# Altium PCB PCB_Smartpill.pcbdoc
Units mm, origin at the board's own origin, x right, y up, seen from the top; angles counter-clockwise.
Board outline 200.21 x 103.89 mm, 2 copper layers (Top Layer, Bottom Layer); 62 components, 23 nets, 388 pads, 1 vias.
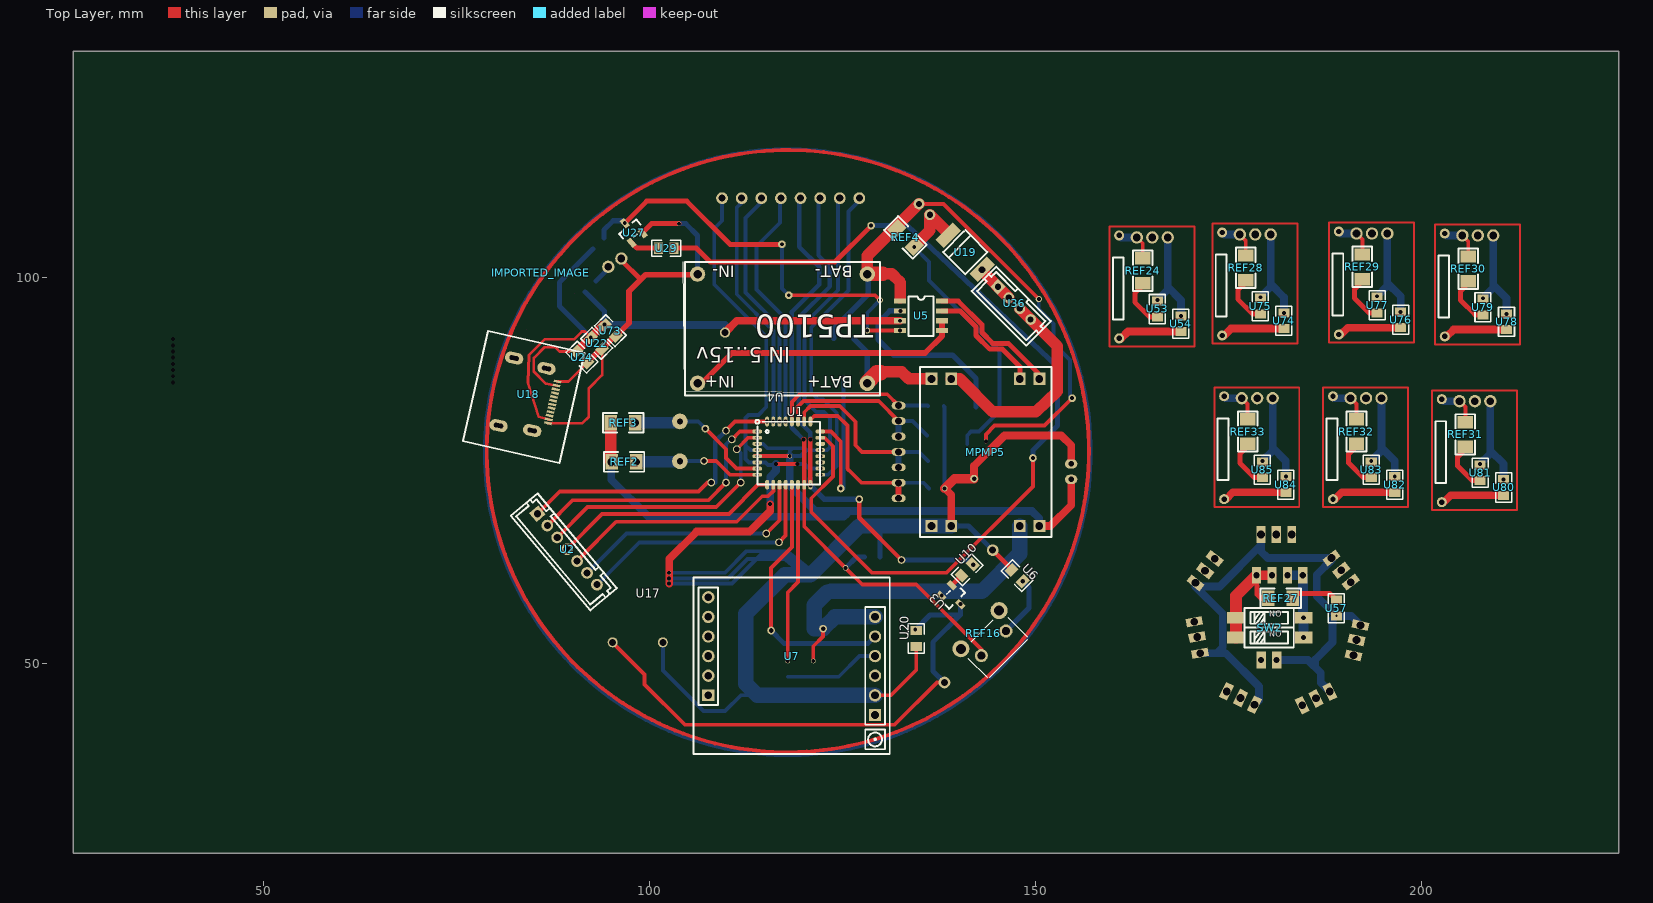
[diagram p0: Top Layer view]
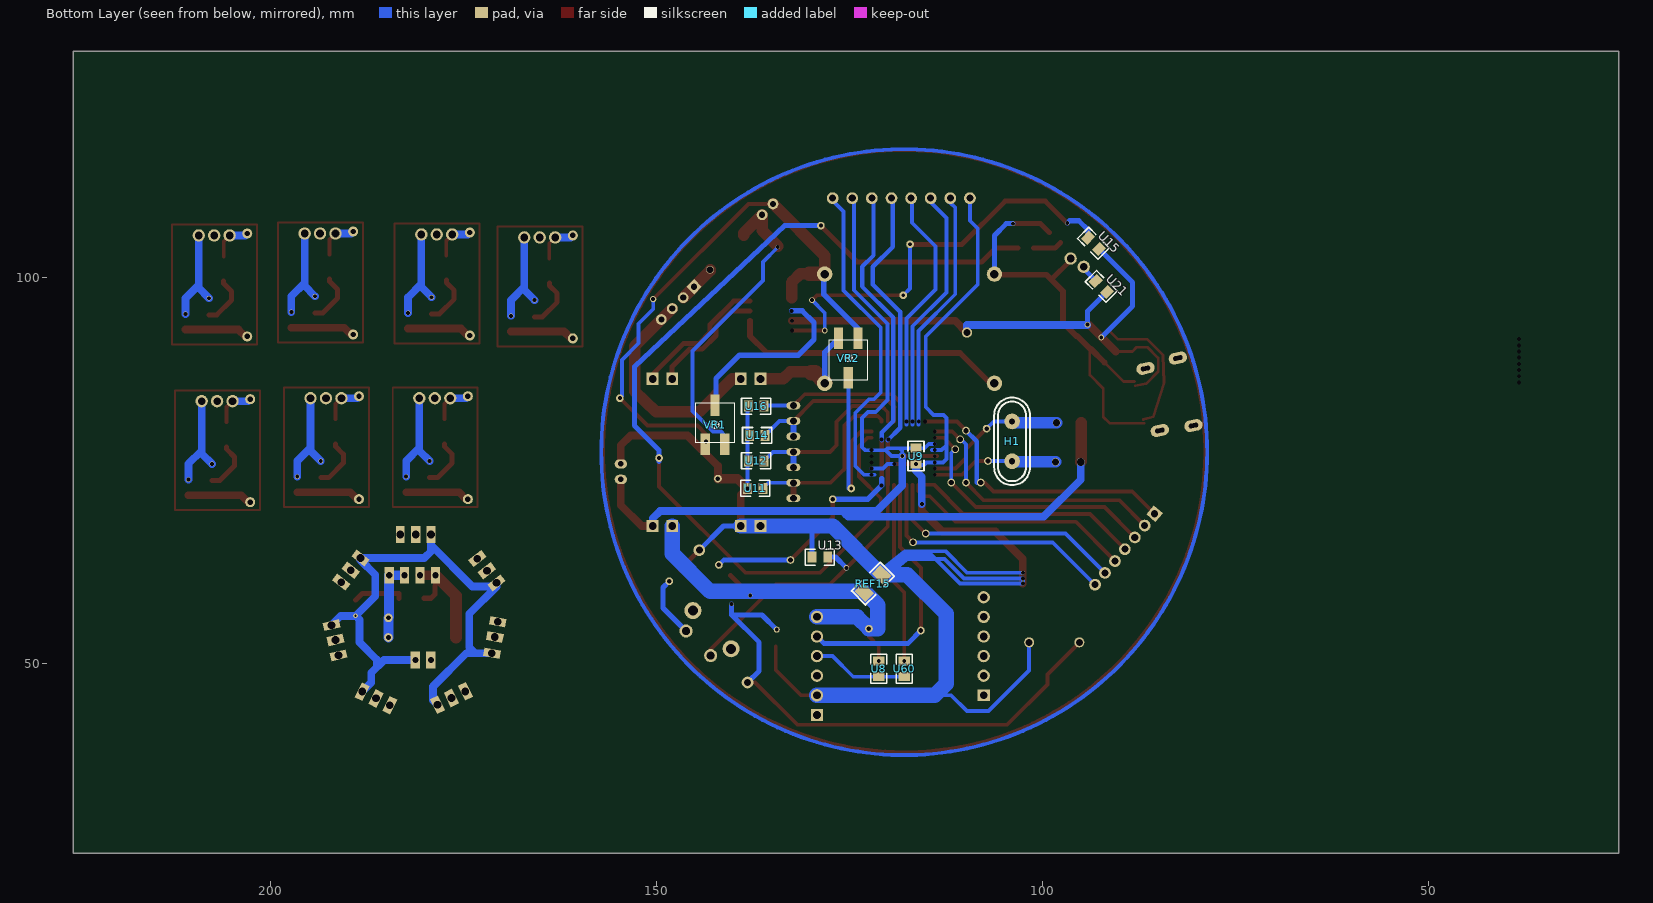
[diagram p1: Bottom Layer view, seen from below]

## Layer stack, top to bottom
Top Layer: signal copper (thickness not stored)
Dielectric: dielectric 0.32, FR-4, Dk 4.8
Bottom Layer: signal copper (thickness not stored)

## Board outline
225.612,25.4 25.4,25.4 25.4,129.286 225.612,129.286

## Components (designator, comment, footprint, x,y, rotation, side; value= is the part's Value field where it differs from the comment)
H1 "CRYSTAL" CRYSTAL 103.995,78.74 r90 bottom
IMPORTED_IMAGE "IMPORTED_IMAGE" IMPORTED_IMAGE 86.001,100.566 r0 top
MPMP5 "_" ? 143.619,77.343 r180 top
REF2 "1206" 1206#1 96.756,76.073 r0 top
REF3 "1206" 1206#1 96.629,81.153 r0 top
REF4 "1206" 1206#1 133.205,105.156 r135 top
REF15 "1206" 1206#2 122.029,60.325 r135 bottom
REF16 "SW_TACTILE_SKHH_ANGLED" SW_TACTILE_SKHH_ANGLED 143.746,53.467 r45 top
REF24 "1206" 1206#1 163.939,100.838 r90 top
REF27 "1206" 1206#1 181.789,58.42 r0 top
REF28 "1206" 1206#1 177.274,101.219 r90 top
REF29 "1206" 1206#1 192.387,101.346 r90 top
REF30 "1206" 1206#1 206.103,101.092 r90 top
REF31 "1206" 1206#1 205.722,79.629 r90 top
REF32 "1206" 1206#1 191.625,80.01 r90 top
REF33 "1206" 1206#1 177.528,80.01 r90 top
SW2 "SWITCH-KE-2BIT/2.54_SMD" SWITCH-KE-2BIT/2.54_SMD 180.392,54.61 r270 top
U1 "ATMEGA328" ATMEGA328 118.092,77.216 r0 top
U2 "CONN-TH_7P-P2.00_B7B-PH-K-M" CONN-TH_7P-P2.00_B7B-PH-K-M 89.39,64.77 r310 top
U3 "SOT-23-3_L2.9-W1.6-P1.90-LS2.8-BR-CW" SOT-23-3_L2.9-W1.6-P1.90-LS2.8-BR-CW 139.428,58.547 r135 top
U4 "TP5100-MODULE" TP5100-MODULE 129.903,84.709 r180 top
U5 "SO-8_L4.9-W3.9-P1.27-LS5.9-BL" SO-8_L4.9-W3.9-P1.27-LS5.9-BL 135.237,94.996 r270 top
U6 "0805" 0805#1 147.683,61.341 r315 top
U7 "SIM800L" SIM800L 126.728,56.007 r180 top
U8 "0805" 0805#2 121.267,49.276 r90 bottom
U9 "0805" 0805#2 116.441,76.835 r90 bottom
U10 "SENSORS-SMD_0805" SENSORS-SMD_0805#1 141.206,62.103 r45 top
U11 "0805" 0805#2 137.269,72.644 r0 bottom
U12 "0805" 0805#2 137.142,76.2 r0 bottom
U13 "0805" 0805#2 128.887,63.754 r0 bottom
U14 "0805" 0805#2 137.015,79.502 r0 bottom
U15 "SENSORS-SMD_0805" SENSORS-SMD_0805#2 93.454,104.394 r45 bottom
U16 "0805" 0805#2 137.142,83.312 r0 bottom
U17 "BUZZER-12MM-NS" BUZZER-12MM-NS 98.534,52.705 r0 top
U18 "TYPE C MINE" "TYPE C MINE" 83.548,83.82 r347 top
U19 "SS34" SS34 140.952,103.251 r315 top
U20 "0805" 0805#1 134.602,53.213 r90 top
U21 "0805" 0805#2 92.438,98.806 r45 bottom
U22 "0805" 0805#1 93.2,91.44 r135 top
U24 "0805" 0805#1 91.295,89.662 r135 top
U27 "SOT-23-3_L2.9-W1.3-P1.90-LS2.4-BR" SOT-23-3_L2.9-W1.3-P1.90-LS2.4-BR 97.645,106.045 r310 top
U29 "0805" 0805#1 102.217,103.759 r0 top
U36 "CONN-TH_B4B-PH-K-LF-SN" CONN-TH_B4B-PH-K-LF-SN 147.302,96.647 r135 top
U53 "0805" 0805#1 165.844,95.885 r90 top
U54 "0805" 0805#1 168.892,93.98 r90 top
U57 "0805" 0805#1 189.028,57.15 r90 top
U60 "0805" 0805#2 117.965,49.276 r90 bottom
U73 "0805" 0805#1 94.978,93.091 r135 top
U74 "0805" 0805#1 182.227,94.361 r90 top
U75 "0805" 0805#1 179.179,96.266 r90 top
U76 "0805" 0805#1 197.34,94.488 r90 top
U77 "0805" 0805#1 194.292,96.393 r90 top
U78 "0805" 0805#1 211.056,94.234 r90 top
U79 "0805" 0805#1 208.008,96.139 r90 top
U80 "0805" 0805#1 210.675,72.771 r90 top
U81 "0805" 0805#1 207.627,74.676 r90 top
U82 "0805" 0805#1 196.578,73.152 r90 top
U83 "0805" 0805#1 193.53,75.057 r90 top
U84 "0805" 0805#1 182.481,73.152 r90 top
U85 "0805" 0805#1 179.433,75.057 r90 top
VR1 "POTENCIOMETRO SMD" "POTENCIOMETRO SMD" 143.492,81.407 r180 bottom
VR2 "POTENCIOMETRO SMD" "POTENCIOMETRO SMD" 124.188,89.027 r0 bottom

## Footprints (in the part's own frame and the unit in brackets; to place one, negate y for a bottom-side part, rotate by r counter-clockwise, add the part's x,y. Pads: shape width x height; smd on the part's side, far side on the other; paste and mask are expansions set on the pad)
0805#1 [mm]
  rect 1.16x1.45 smd paste+0 mask+0.102: 1(-1.016,0) 2(1.016,0)
  silkscreen extent -1.9,-1.03 1.87,1.04
0805#2 [mm]
  rect 1.16x1.45 smd paste+0 mask+0.102: 1(1.016,0) 2(-1.016,0)
  silkscreen extent -1.87,-1.04 1.9,1.03
1206#1 [mm]
  rect 1.6x2 smd paste+0 mask+0.102: 1(-1.6,0) 2(1.6,0)
  silkscreen extent -2.61,-1.27 2.62,1.27
1206#2 [mm]
  rect 1.6x2 smd paste+0 mask+0.102: 1(1.6,0) 2(-1.6,0)
  silkscreen extent -2.62,-1.27 2.61,1.27
ATMEGA328 [mm]
  oval 1.27x0.5 smd paste+0 mask+0.05: 1(-4.088,2.8) 2(-4.088,2) 3(-4.088,1.2) 4(-4.088,0.4) 5(-4.088,-0.4) 6(-4.088,-1.2) 7(-4.088,-2) 8(-4.088,-2.8) 17(4.088,-2.8) 18(4.088,-2) 19(4.088,-1.2) 20(4.088,-0.4) 21(4.088,0.4) 22(4.088,1.2) 23(4.088,2) 24(4.088,2.8)
  oval 0.5x1.27 smd paste+0 mask+0.05: 9(-2.8,-4.088) 10(-2,-4.088) 11(-1.2,-4.088) 12(-0.4,-4.088) 13(0.4,-4.088) 14(1.2,-4.088) 15(2,-4.088) 16(2.8,-4.088) 25(2.8,4.088) 26(2,4.088) 27(1.2,4.088) 28(0.4,4.088) 29(-0.4,4.088) 30(-1.2,4.088) 31(-2,4.088) 32(-2.8,4.088)
  silkscreen extent -4.32,-4.06 4.06,4.32
BUZZER-12MM-NS [mil]
  round 51.2 hole 35.4 paste+0 mask+4: +(128,0) -(-128,0)
CONN-TH_7P-P2.00_B7B-PH-K-M [mil]
  rect 60x60 hole 36 paste+0 mask+4: 1(-236.22,0)
  round 60 hole 36 paste+0 mask+4: 2(-157.48,0) 3(-78.74,0) 4(0,0) 5(78.74,0) 6(157.48,0) 7(236.22,0)
  silkscreen extent -315,-110 315,67
CONN-TH_B4B-PH-K-LF-SN [mm]
  rect 1.4x1.4 hole 0.8 paste+0 mask+0.102: 1(3,0)
  round 1.4 hole 0.8 paste+0 mask+0.102: 2(1,0) 3(-1,0) 4(-3,0)
  silkscreen extent -5,-1.7 5,2.8
CRYSTAL [mil]
  round 80 hole 32 paste+0 mask+4: 1(101.6,0) 2(-101.6,0)
  silkscreen extent -224,-91 224,91
IMPORTED_IMAGE [mm]
"POTENCIOMETRO SMD" [mil]
  rect 46.85x109.84 smd paste+0 mask+4: 1(-10,-120) 2(40,80) 3(90,-120)
  silkscreen extent -60,-110 140,90
SENSORS-SMD_0805#1 [mm]
  rect 1.16x1.45 smd paste+0 mask+0.051: 1(-1.016,0) 2(1.016,0)
  silkscreen extent -1.9,-1.03 1.87,1.04
SENSORS-SMD_0805#2 [mm]
  rect 1.16x1.45 smd paste+0 mask+0.051: 1(1.016,0) 2(-1.016,0)
  silkscreen extent -1.87,-1.04 1.9,1.03
SIM800L [mm]
  rect 1.6x1.524 hole 1 paste+0 mask+0.102: 0(-2.54,12.7) 11(19.05,10.16)
  round 1.6 hole 1 paste+0 mask+0.102: 1(-2.54,10.16) 2(-2.54,7.62) 3(-2.54,5.08) 4(-2.54,2.54) 5(-2.54,0) 6(19.05,-2.54) 7(19.05,0) 8(19.05,2.54) 9(19.05,5.08) 10(19.05,7.62)
  silkscreen extent -4.45,-5.08 20.95,17.78
SO-8_L4.9-W3.9-P1.27-LS5.9-BL [mm]
  rect 0.65x1.55 smd paste+0 mask+0.102: 1(-1.905,-2.72) 2(-0.635,-2.72) 3(0.635,-2.72) 4(1.905,-2.72) 5(1.905,2.72) 6(0.635,2.72) 7(-0.635,2.72) 8(-1.905,2.72)
  silkscreen extent -2.54,-1.61 2.6,1.63
SOT-23-3_L2.9-W1.3-P1.90-LS2.4-BR [mm]
  rect 1.25x0.7 smd paste+0 mask+0.102: 1(1.25,-0.95) 2(1.25,0.95) 3(-1.25,0)
  silkscreen extent -0.65,-1.46 0.9,1.46
SOT-23-3_L2.9-W1.6-P1.90-LS2.8-BR-CW [mm]
  rect 1.25x0.7 smd paste+0 mask+0.051: 1(1.25,-0.95) 2(-1.25,0) 3(1.25,0.95)
  silkscreen extent -0.65,-1.46 0.9,1.46
SS34 [mil]
  rect 60x126 smd paste+0 mask+4: 1(122.5,0) 2(-122.5,0)
  silkscreen extent -80,-80 80,80
SW_TACTILE_SKHH_ANGLED [mm]
  round 1.7 hole 1 slot 1.005 at 0 deg paste+0 mask+0.102: 1(-2.25,-1.249) 2(2.251,-1.249)
  round 2.2 hole 1.3 paste+0 mask+0.102: ""(-3.5,1.25) ""(3.5,1.25)
  silkscreen extent -3.7,-4 3.7,0.95
SWITCH-KE-2BIT/2.54_SMD [mil]
  rect 60x90 smd paste+0 mask+4: 1(50,172.24) 2(-50,172.24) 3(-50,-172.24) 4(50,-172.24)
  silkscreen extent -100,-128 100,122
TP5100-MODULE [mm]
  round 2 hole 1.1 paste+0 mask+0.102: BAT+(1.625,-1.55) BAT-(1.625,-15.7) IN+(23.625,-1.55) IN-(23.625,-15.7)
  silkscreen extent 0,-17.25 25.25,0
"TYPE C MINE" [mm]
  oval 2.4x1.5 hole 0.6 slot 1.2 at 0 deg paste+0 mask+0.102: 25(-2.286,5.334) 25(-2.286,-3.646) 25(2.104,4.974) 25(2.104,-3.286)
  rect 1.01x0.35 smd paste+0 mask+0.102: A1(3.879,3.634) A2(3.879,3.094) A3(3.879,2.594) A4(3.879,2.094) A5(3.879,1.594) A6(3.879,1.094) A7(3.879,0.594) A8(3.879,0.094) A9(3.879,-0.406) A10(3.879,-0.906) A11(3.879,-1.406) A12(3.879,-1.906)
  silkscreen extent -6.35,-6.6 6.48,8
? [mil]
  rect 60x62.99 hole 39.37 paste+0 mask+4: 162(-273,376.5) 163(-173,376.5) 164(277,376.5) 165(177,376.5) 166(277,-373.5) 167(177,-373.5) 168(-273,-373.5) 169(-173,-373.5)
  silkscreen extent -335,-434 335,434

## Free pads (board coordinates)
  round 1.6 hole 1 paste+0 mask+0.102: 1(96.411,102.421) 1(163.177,105.156) 1(176.512,105.537) 1(176.766,84.328) 1(190.863,84.328) 1(191.625,105.664) 1(204.96,83.947) 1(205.341,105.41) 2(94.724,101.346) 2(165.177,105.156) 2(178.512,105.537) 2(178.766,84.328) 2(192.863,84.328) 2(193.625,105.664) 2(206.96,83.947) 2(207.341,105.41) 3(167.177,105.156) 3(180.512,105.537) 3(180.766,84.328) 3(194.863,84.328) 3(195.625,105.664) 3(208.96,83.947) 3(209.341,105.41)
  oval 1.8x1 hole 0.9 paste+0 mask+0.102: 1(132.316,71.374) 2(132.316,73.374) 3(132.316,75.374) 4(132.316,77.374) 5(132.316,79.374) 6(132.316,81.374) 7(132.316,83.374)
  rect 1.119x2.159 hole 1 rot 101 paste+0 mask+0.102: 1(170.613,55.372) 3(171.376,51.295)
  rect 1.119x2.159 hole 1 rot 51.5 paste+0 mask+0.102: 1(170.771,60.42) 3(173.261,63.551)
  rect 1.119x2.159 hole 1 rot 154.5 paste+0 mask+0.102: 1(178.414,44.633) 3(174.804,46.355)
  rect 1.119x2.159 hole 1 paste+0 mask+0.102: 1(183.249,66.675) 3(179.249,66.675)
  rect 1.119x2.159 hole 1 rot 26 paste+0 mask+0.102: 1(184.583,44.577) 3(188.178,46.33)
  rect 1.119x2.159 hole 1 rot 128.5 paste+0 mask+0.102: 1(188.393,63.627) 3(190.883,60.497)
  rect 1.119x2.159 hole 1 rot 77 paste+0 mask+0.102: 1(191.239,51.03) 3(192.139,54.927)
  round 1.4 hole 0.8 paste+0 mask+0.102: 2(134.96,109.497) 3(136.374,108.083)
  rect 1.199x2.159 hole 1 rot 101 paste+0 mask+0.102: 2(170.994,53.409)
  rect 1.199x2.159 hole 1 rot 51.5 paste+0 mask+0.102: 2(172.016,61.985)
  rect 1.199x2.159 hole 1 rot 154.5 paste+0 mask+0.102: 2(176.609,45.494)
  rect 1.199x2.159 hole 1 paste+0 mask+0.102: 2(181.249,66.675)
  rect 1.199x2.159 hole 1 rot 26 paste+0 mask+0.102: 2(186.38,45.454)
  rect 1.199x2.159 hole 1 rot 128.5 paste+0 mask+0.102: 2(189.638,62.062)
  rect 1.199x2.159 hole 1 rot 77 paste+0 mask+0.102: 2(191.639,53.023)
  round 1.524 hole 0.914 paste+0 mask+0.102: 3(109.456,110.236) 4(111.996,110.236) 5(114.536,110.236) 6(117.076,110.236) 7(119.616,110.236) 8(122.156,110.236) 9(124.696,110.236) 10(127.236,110.236)
  round 0.254 hole 0.508 paste+0.102 mask+0.102: 6(38.354,86.378) 7(38.354,87.178) 8(38.354,87.978) 9(38.354,88.778) 10(38.354,89.578) 11(38.354,90.378) 12(38.354,91.178) 13(38.354,91.978)
  oval 1.6x1.2 hole 0.7 paste+0 mask+0.102: 7(154.668,75.819) 8(154.668,73.819)
  round 0.051 hole 0.5 unplated paste+0 mask+0.102: 39(114.004,75.216) 40(114.004,74.416) 41(114.004,76.016) 42(114.004,76.816) 43(114.004,77.616) 44(114.004,78.416) 45(114.004,79.216) 46(114.004,80.016) 55(122.18,74.416) 56(122.18,75.216) 57(122.18,76.016) 58(122.18,76.816) 59(122.18,77.616) 67(117.692,81.304) 68(116.892,81.304) 69(116.092,81.304) 70(115.292,81.304) 75(119.997,78.994) 77(120.892,78.994)
  round 0.6 hole 0.5 paste+0 mask+0.102: 78(118.219,76.835) 143(117.965,50.292) 219(121.267,50.292) 220(165.844,97.028) 220(168.892,94.996) 220(179.179,97.409) 220(179.433,76.2) 220(182.227,95.377) 220(182.481,74.168) 220(193.53,76.2) 220(194.292,97.536) 220(196.578,74.168) 220(197.34,95.504) 220(207.627,75.819) 220(208.008,97.282) 220(210.675,73.787) 220(211.056,95.25)
  round 1 hole 1 paste+0 mask+0.102: 87(95.105,76.073)
  round 0.5 hole 0.5 paste+0 mask+0.102: 120(115.679,70.612) 124(102.598,60.325) 125(102.598,60.96) 126(102.598,61.722)
  round 1 hole 0.6 paste+0 mask+0.102: 127(142.095,73.914) 216(115.806,54.24) 218(122.536,54.483) 230(127.236,71.247) 232(132.697,63.373) 233(141.968,62.738) 233(148.401,60.623) 244(107.297,80.391) 245(107.118,76.2)
  round 0.051 hole 0.5 paste+0 mask+0.102: 128(132.57,95.631) 167(132.517,93.091) 169(132.517,94.361) 229(120.886,73.025) 237(116.441,75.819) 238(119.235,75.819)
  round 1 hole 0.5 paste+0 mask+0.102: 131(124.823,72.644) 170(149.715,76.581) 184(117.203,104.267) 185(118.092,97.663) 187(128.76,106.68)
  round 1 hole 0.7 paste+0 mask+0.102: 136(115.171,66.802) 138(116.822,65.659) 205(109.964,80.137) 206(110.726,78.994) 207(111.361,77.724) 208(111.869,73.406) 209(109.964,73.406) 210(108.059,73.406)
  round 1.35 hole 0.9 paste+0 mask+0.102: 164(109.837,92.837)
  round 0.51 hole 0.5 paste+0 mask+0.102: 181(103.868,106.934) 186(96.842,107.002)
  round 1 hole 0.9 paste+0 mask+0.102: 203(143.111,100.965)
  round 1.3 hole 0.7 paste+0 mask+0.102: 211(160.891,92.075) 211(174.226,92.456) 211(174.48,71.247) 211(188.577,71.247) 211(189.339,92.583) 211(202.674,70.866) 211(203.055,92.329) 212(160.891,105.41) 212(174.226,105.791) 212(174.48,84.582) 212(188.577,84.582) 212(189.339,105.918) 212(202.674,84.201) 212(203.055,105.664)
  round 0.75 hole 0.5 paste+0 mask+0.102: 221(129.903,97.028) 222(128.252,93.091) 224(138.285,72.644) 226(94.216,93.853) 228(92.438,92.202)
  round 1.119 hole 0.6 paste+0 mask+0.102: 239(184.767,55.88) 241(184.767,53.34)
  round 1.5 hole 0.9 paste+0 mask+0.102: 242(144.508,64.643)
  round 0.7 hole 0.5 paste+0 mask+0.102: 243(125.458,62.357)
  round 1 hole 0.914 paste+0.102 mask+0.102: 246(98.356,76.073) 247(98.229,81.153)
  round 0.52 hole 0.51 paste+0.102 mask+0.102: 248(137.904,58.801) 249(140.312,57.663) 251(134.348,103.886) 252(143.619,78.74)
  round 0.8 hole 0.51 paste+0.102 mask+0.102: 253(150.477,97.155) 255(134.475,54.356)
  round 1 hole 0.51 paste+0.102 mask+0.102: 254(154.795,84.328)
  round 1.524 hole 0.914 paste+0.102 mask+0.102: 256(138.256,47.51)
  rect 1.199x2.159 hole 0.798 paste+0 mask+0.102: P1(184.672,61.404) P2(182.691,61.404) P3(180.684,61.404) P3(181.281,50.419) P4(178.677,61.404) P4(179.274,50.419)

## Via types
v1: diameter 0.61, hole 0.305, Top Layer to Bottom Layer, tented both sides, 1 vias

## Nets (pads, with @x,y where several pads share a name; then routed paths per layer and width w, separated by ;. In a path a pad name is that pad's centre, name@x,y a point inside that pad or via, vN(x,y) a via of type N, cw(c..) or ccw(c..) an arc to the next point about the centre after c; other vN are vias at no path point)
0.75:  | length 35.1
  Top Layer w0.75: 106.281,86.106 106.294,86.36 106.916,86.36 110.726,90.17 135.745,90.17 137.957,92.382 137.957,93.091
1:  | length 31.3
  Bottom Layer w0.5: 114.449,109.601 112.504,107.656 112.504,98.044 116.893,93.655 116.893,80.917
2:  | length 30.9
  Bottom Layer w0.5: 111.948,109.601 111.361,109.014 111.361,97.79 116.093,93.058 116.093,80.917
S$4592: H1.1 H1.2 pad.40 pad.244 pad.245 pad.246 pad.247 REF2.2 REF3.2 U1.7 U1.8 | length 35.5
  Top Layer w0.5: pad.245 108.694,76.2 110.478,74.416 U1.8@114.004,74.416 ; pad.244 109.964,77.724 109.964,76.581 111.328,75.217 U1.7
  Bottom Layer w0.5: H1.2 104.036,76.2 pad.245 ; H1.1 106.367,81.321 pad.244
  Bottom Layer w1.5: pad.247 103.827,81.153 H1.1 ; pad.246 103.909,76.073 H1.2
S$5231:  | length 245
  Top Layer w0.5: 156.965,77.47 ccw(c117.965,77.47) 156.965,77.47
S$7168: pad.69
S$7171: pad.68
S$7175: pad.67
S$7303:  | length 41.2
  Bottom Layer w0.5: 121.785,74.422 123.172,74.422 124.315,75.565 124.315,82.423 122.537,84.201 121.902,84.201 121.013,85.09 121.013,93.472 125.839,98.298 125.839,108.491 126.949,109.601
S$7461:  | length 68.3
  Bottom Layer w0.5: 116.949,109.601 116.949,107.061 113.901,104.013 113.901,98.425 117.691,94.633 117.691,80.917 ; 122.156,77.597 123.045,77.597 123.426,77.978 123.426,81.788 122.664,82.55 121.648,82.55 120.124,84.074 120.124,93.98 124.45,98.306 124.45,109.601
S$8346: pad.216 U1.13 U7.4 | length 34.5
  Top Layer w0.5: pad.216 115.806,62.357 118.492,65.043 U1.13
  Bottom Layer w0.65: pad.216 117.457,52.578 128.379,52.578 U7.4
S$8348: pad.143 U1.14 | length 23.4
  Top Layer w0.5: pad.143 117.965,59.182 119.291,60.508 U1.14@119.291,73.129
S$8986: pad.128 | length 24.1
  Bottom Layer w0.7: 132.517,95.631 131.173,95.631 129.649,94.107 129.649,91.948 131.681,89.916 139.301,89.916 142.349,86.868 142.349,83.185
S$9004: VR1.2
S$11449: REF16.2 | length 8
  Bottom Layer w0.65: REF16.2@146.22,54.173 149.207,57.16 149.207,59.817 148.402,60.622
S$13526: U27.1 U29.1 | length 3.8
  Top Layer w0.65: U27.1 98.439,103.759 U29.1
S$19612: REF24.1 REF28.1 REF29.1 REF30.1 REF31.1 REF32.1 REF33.1 U53.1 U75.1 U77.1 U79.1 U81.1 U83.1 U85.1 | length 46.2
  Top Layer w0.65: REF24.1 163.939,98.933 162.923,97.917 162.923,96.774 164.828,94.869 U53.1 ; REF28.1 177.274,99.314 176.258,98.298 176.258,97.155 178.163,95.25 U75.1 ; REF33.1 177.528,78.105 176.512,77.089 176.512,75.946 178.417,74.041 U85.1 ; REF32.1 191.625,78.105 190.609,77.089 190.609,75.946 192.514,74.041 U83.1 ; REF29.1 192.387,99.441 191.371,98.425 191.371,97.282 193.276,95.377 U77.1 ; REF31.1 205.722,77.724 204.706,76.708 204.706,75.565 206.611,73.66 U81.1 ; REF30.1 206.103,99.187 205.087,98.171 205.087,97.028 206.992,95.123 U79.1
S$21981: pad.1@170.771,60.42 pad.1@178.414,44.633 pad.1@188.393,63.627 pad.2@191.639,53.023 pad.3@171.376,51.295 pad.3@179.249,66.675 pad.3@188.178,46.33 pad.3@192.139,54.927 pad.P3@181.281,50.419 pad.P4@179.274,50.419 U57.1 | length 76.9
  Bottom Layer w1: pad.3@171.376,51.295 173.521,51.295 ; pad.1@178.414,44.633 178.995,45.214 178.995,46.99 174.689,51.295 173.521,51.295 ; pad.P3@181.281,50.419 185.345,50.419 186.996,48.768 186.996,47.513 pad.3@188.178,46.33 ; 186.292,49.472 186.292,50.477 188.52,52.705 188.52,55.626 v1(189.028,56.134) ; pad.3@192.139,54.927 190.933,56.134 v1(189.028,56.134) ; 173.521,51.295 174.296,52.07 174.296,56.388 170.771,59.913 170.771,60.42 171.247,59.944 173.915,59.944 179.249,65.278 179.249,66.675 179.249,64.516 180.138,63.627 188.393,63.627 188.393,63.373 186.488,61.468 186.488,58.674 v1(189.028,56.134)
S$21983: REF27.2 U57.2 | length 6.6
  Top Layer w0.65: REF27.2 183.389,59.055 188.139,59.055 U57.2
S$24530: pad.239 pad.241 pad.P1 pad.P2 pad.P3@180.684,61.404 pad.P4@178.677,61.404 REF27.1 SW2.1 SW2.2 SW2.3 SW2.4 | length 25.4
  Top Layer w0.65: pad.P4@178.677,61.404 178.741,58.928 179.249,58.42 REF27.1@180.189,58.42
  Top Layer w1.2: pad.P4@178.677,61.404 pad.P3@180.684,61.404
  Top Layer w1.5: SW2.4 176.017,58.744 pad.P4@178.677,61.404
  Bottom Layer w1.2: pad.P2 pad.P1
  Bottom Layer w1.3: pad.P1 184.672,55.975 pad.239 pad.241
S$36070: MPMP5.162 MPMP5.163 MPMP5.164 MPMP5.165 MPMP5.166 MPMP5.167 MPMP5.168 MPMP5.169 pad.1@96.411,102.421 pad.1@132.316,71.374 pad.1@163.177,105.156 pad.1@176.512,105.537 pad.1@176.766,84.328 pad.1@190.863,84.328 pad.1@191.625,105.664 pad.1@204.96,83.947 pad.1@205.341,105.41 pad.2@94.724,101.346 pad.2@132.316,73.374 pad.2@134.96,109.497 pad.3@132.316,75.374 pad.3@136.374,108.083 pad.3@167.177,105.156 pad.3@180.512,105.537 pad.3@180.766,84.328 pad.3@194.863,84.328 pad.3@195.625,105.664 pad.3@208.96,83.947 pad.3@209.341,105.41 pad.4@132.316,77.374 pad.5@132.316,79.374 pad.6@132.316,81.374 pad.7@132.316,83.374 pad.7@154.668,75.819 pad.8@154.668,73.819 pad.41 pad.42 pad.43 pad.44 pad.56 pad.59 pad.75 pad.77 pad.78 pad.87 pad.120 pad.124 pad.125 pad.126 pad.127 pad.131 pad.136 pad.138 pad.164 pad.167 pad.169 pad.170 pad.181 pad.184 pad.185 pad.186 pad.187 pad.203 pad.205 pad.206 pad.207 pad.208 pad.209 pad.210 pad.211 pad.212 pad.218 pad.219 pad.220 pad.221 pad.222 pad.224 pad.226 pad.228 pad.229 pad.230 pad.232 pad.233 pad.237 pad.238 pad.242 pad.243 pad.248 pad.249 pad.252 pad.253 pad.254 pad.255 pad.256 REF2.1 REF3.1 REF4.1 REF15.1 REF15.2 REF16.1 REF24.2 REF28.2 REF29.2 REF30.2 REF31.2 REF32.2 REF33.2 U1.1 U1.2 U1.3 U1.5 U1.9 U1.10 U1.11 U1.12 U1.15 U1.16 U1.21 U1.23 U1.24 U1.25 U1.26 U1.27 U1.28 U1.32 U2.6 U2.7 U5.1 U5.3 U5.4 U5.5 U5.6 U5.7 U5.8 U6.1 U7.1 U7.3 U7.5 U8.1 U8.2 U9.1 U9.2 U11.1 U11.2 U12.1 U12.2 U13.1 U13.2 U14.2 U15.1 U15.2 U16.1 U16.2 U17.+ U17.- U18.A1 U18.A4 U18.A9 U18.A12 U19.1 U19.2 U20.1 U21.1 U21.2 U22.1 U22.2 U24.1 U24.2 U27.2 U27.3 U29.2 U36.2 U36.3 U36.4 U53.2 U54.1 U54.2 U60.2 U73.1 U73.2 U74.1 U74.2 U75.2 U76.1 U76.2 U77.2 U78.1 U78.2 U79.2 U80.1 U80.2 U81.2 U82.1 U82.2 U83.2 U84.1 U84.2 U85.2 VR1.1 VR2.1 VR2.2 VR2.3 | length 1999.8
  Top Layer w0.35: U18.A12 91.359,81.09 92.184,81.915 92.184,85.598 93.919,87.333 U22.1 ; 87.011,81.577 85.707,81.915 84.31,86.36 84.437,89.916 86.469,91.948 90.279,91.948 91.295,92.964 91.676,92.964 U22.2 ; 88.024,85.962 86.596,86.233 85.072,87.757 85.072,89.535 86.469,90.932 87.866,90.932 88.417,90.381 U24.2 ; U18.A1 89.558,86.487 U24.1
  Top Layer w0.5: 85.534,69.367 88.43,72.263 106.408,72.263 107.551,73.406 pad.210 ; 86.819,67.833 90.099,71.12 107.678,71.12 pad.209 ; 88.105,66.302 92.034,70.231 108.694,70.231 pad.208 ; 89.39,64.77 93.906,69.342 110.345,69.342 114.13,73.129 U1.9@115.293,73.129 ; 90.675,63.238 90.975,63.561 95.74,68.326 111.361,68.326 114.663,71.628 115.425,71.628 116.093,72.296 U1.10@116.093,73.129 ; U17.- 99.423,48.565 99.423,47.244 104.63,42.037 131.808,42.037 137.281,47.51 pad.256 ; pad.205 111.131,81.304 U1.32@115.292,81.304 ; pad.206 111.748,80.016 U1.1@114.004,80.016 ; pad.207 112.853,79.216 U1.2@114.004,79.216 ; U1.5@113.686,76.817 113.704,76.835 pad.78 ; pad.136 116.892,68.523 U1.11 ; pad.237 pad.238 ; pad.138 117.691,66.528 U1.12@117.691,73.129 ; pad.185 129.268,97.663 pad.221 ; U1.28@118.493,81.303 118.493,83.838 119.489,84.836 130.853,84.836 pad.7@132.316,83.373 ; U1.27 119.291,83.129 119.235,83.185 119.997,83.947 129.743,83.947 pad.6@132.316,81.374 ; U1.15@120.091,73.129 120.091,67.724 pad.243 127.617,60.198 134.602,60.198 143.04,51.76 REF16.1@143.04,50.993 ; U1.26 120.091,82.517 120.886,83.312 124.696,83.312 126.728,81.28 126.728,78.232 127.586,77.374 pad.4@132.316,77.374 ; U1.25 120.891,81.539 121.394,82.042 124.442,82.042 125.712,80.772 125.712,75.184 126.22,74.676 127.522,73.374 pad.2@132.316,73.374 ; pad.219 121.267,52.197 122.536,53.466 pad.218 ; U1.23 122.696,79.216 123.807,78.105 123.807,74.168 ; U1.24 123.547,80.016 124.823,78.74 pad.131 ; 123.743,74.105 123.807,74.168 ; pad.222 U5.4 ; U7.1 131.3,45.847 134.602,49.149 U20.1 ; pad.2@134.96,109.497 138.135,109.497 pad.253 ; pad.252 143.619,79.629 144.762,80.772 151.239,80.772 pad.254 ; pad.170 149.715,72.898 138.539,61.722 128.887,61.722 121.013,69.596 121.013,71.374 123.807,74.168 ; pad.1@163.177,105.156 163.939,104.394 REF24.2 ; pad.1@176.512,105.537 177.274,104.775 REF28.2 ; pad.1@176.766,84.328 177.528,83.566 REF33.2 ; pad.1@190.863,84.328 191.625,83.566 REF32.2 ; pad.1@191.625,105.664 192.387,104.902 REF29.2 ; pad.1@204.96,83.947 205.722,83.185 REF31.2 ; pad.1@205.341,105.41 206.103,104.648 REF30.2
  Top Layer w0.6: pad.75 120.091,78.994 U1.15@120.091,73.129 ; pad.229 120.886,78.988 pad.77 ; pad.230 127.236,68.834 pad.232
  Top Layer w0.65: pad.1@96.411,102.42 96.411,102.199 98.915,99.695 ; U27.3 99.694,109.855 104.884,109.855 110.472,104.267 pad.184 ; U27.2@99.169,105.791 100.312,106.934 pad.181 ; U29.2 106.154,103.759 107.932,101.981 124.061,101.981 pad.187 ; U5.7 140.317,95.631 142.349,93.599 142.349,92.456 144.127,90.678 145.778,90.678 146.489,89.967 148.013,88.443 MPMP5.169 ; U5.8 140.063,96.901 143.111,93.853 143.111,92.837 144.508,91.44 146.54,91.44 150.553,87.427 MPMP5.168 ; pad.242 146.965,62.186 U6.1
  Top Layer w0.75: U24.1 93.791,90.722 U22.1 95.569,92.373 U73.1 ; U73.1 97.391,94.066 97.391,98.171 99.55,100.33 106.281,100.33 ; pad.1@132.316,71.374 pad.2@132.316,73.374 ; U5.5 U5.6
  Top Layer w1: U24.2 94.005,93.81 U73.2 ; pad.126 pad.125 pad.124 102.598,63.5 106.154,67.056 113.012,67.056 115.679,69.723 pad.120 ; pad.164 111.361,94.361 U5.3 ; pad.224 139.123,71.806 MPMP5.165 ; pad.127 142.095,75.565 146.032,79.502 153.398,79.502 154.668,78.232 pad.7@154.668,75.819 ; MPMP5.162 151.963,67.78 154.668,70.485 pad.8@154.668,73.819 ; pad.211@160.891,92.075 161.145,92.075 162.034,92.964 U54.1 ; pad.211@174.226,92.456 174.48,92.456 175.369,93.345 U74.1 ; pad.211@174.48,71.247 174.734,71.247 175.623,72.136 U84.1 ; pad.211@188.577,71.247 188.831,71.247 189.72,72.136 U82.1 ; pad.211@189.339,92.583 189.593,92.583 190.482,93.472 U76.1 ; pad.211@202.674,70.866 202.928,70.866 203.817,71.755 U80.1 ; pad.211@203.055,92.329 203.309,92.329 204.198,93.218 U78.1
  Top Layer w1.2: pad.224 139.555,73.914 pad.127
  Top Layer w1.5: REF3.1 95.029,76.149 pad.87 ; 128.239,100.432 128.239,102.776 pad.2@134.96,109.497 ; 130.03,87.732 132.722,87.732 133.624,86.83 MPMP5.166 ; 130.277,100.446 131.438,100.446 132.443,99.441 132.517,99.261 132.517,97.316 ; REF4.1 136.375,106.063 136.375,108.082 138.752,105.705 U19.2 ; MPMP5.167 140.228,86.83 144.508,82.55 150.096,82.55 152.89,85.217 152.89,91.059 U36.4 U36.3 ; pad.203 143.111,100.838 U36.2
  Top Layer w1.9: 128.252,100.446 130.277,100.446
  Top Layer w2: 128.252,86.36 129.507,87.63 130.03,87.63
  Bottom Layer w0.5: U2.6 97.057,66.802 pad.136 ; U2.7 98.732,65.659 pad.138 ; U17.+ 101.785,49.073 107.043,43.815 109.837,43.815 111.869,45.847 114.028,45.847 ; pad.126 109.837,61.722 112.631,64.516 117.838,64.516 117.965,64.389 ; 109.449,109.601 109.449,107.816 109.456,107.315 108.44,106.299 108.44,99.06 115.171,92.329 115.171,83.185 114.155,82.169 112.885,82.169 112.504,81.788 112.504,76.454 112.941,76.017 pad.41 115.1,76.017 115.425,75.692 116.441,75.692 U9.2 ; pad.209 109.964,78.359 110.599,78.994 pad.206 ; pad.207 111.869,77.216 pad.208 ; 112.504,78.229 113.119,77.615 114.386,77.615 ; pad.44@114.004,78.416 114.79,78.416 115.355,77.851 U9.1 120.124,77.851 120.378,77.597 ; pad.184 117.203,98.552 pad.185 ; U60.2 U8.2 124.569,48.26 127.236,50.927 U7.3 ; 118.597,77.851 118.219,77.473 pad.78 ; pad.238 120.124,75.819 120.727,75.216 pad.56 ; 119.596,76.817 119.578,76.835 pad.78 ; 119.743,62.738 118.346,64.008 114.409,64.008 110.726,60.325 pad.124 ; 119.746,62.484 118.73,63.5 112.758,63.5 110.218,60.96 pad.125 ; 122.156,77.597 120.378,77.597 ; pad.131 125.204,72.644 VR2.2 ; pad.222 128.252,95.377 pad.221 ; pad.2@132.316,73.374 135.523,73.374 U11.2 ; pad.4@132.316,77.374 134.952,77.374 U12.2 ; pad.6@132.316,81.374 134.127,81.374 U14.2 ; pad.7@132.316,83.374 136.064,83.374 U16.2 ; U16.1 138.285,83.185 U11.1 ; pad.253 150.477,95.885 152.382,93.98 152.382,91.44 154.541,89.281 154.541,84.582 pad.254 ; pad.124 pad.125 ; pad.124 pad.125 ; pad.78 119.616,76.835 120.378,77.597 ; 157.208,77.343 ccw(c117.965,77.343) 157.208,77.343
  Bottom Layer w0.57: 119.448,109.601 119.448,103.927 122.029,101.346 122.029,99.06 118.473,95.504 118.473,80.518 120.124,78.867 ; 120.886,78.867 120.886,79.883 119.362,81.407 119.362,94.742 123.426,98.806 123.426,101.346 121.95,102.822 ; 121.949,102.823 121.949,109.601
  Bottom Layer w0.6: pad.210 108.567,73.406 108.567,78.74 pad.205 ; pad.232 141.333,63.373 pad.233@141.968,62.738
  Bottom Layer w0.65: U21.2 94.216,95.591 pad.226 ; pad.228 88.374,96.266 88.374,99.314 U15.2 ; U21.1 94.724,101.092 pad.2@94.724,101.346 ; U15.1 94.173,106.129 95.359,107.315 96.53,107.315 pad.186 ; pad.181 104.757,106.934 106.281,105.41 106.281,100.33 ; pad.243 126.855,63.754 U13.2 ; pad.187 133.459,106.68 152.89,88.451 152.89,80.772 149.715,77.597 pad.170@149.715,76.108 ; U13.1 129.903,66.878 ; pad.255 136.38,56.261 140.312,56.261 pad.249 140.312,56.256 136.761,52.705 136.761,49.007 pad.256 pad.256@138.493,47.272 ; MPMP5.165 141.371,67.78 pad.242
  Bottom Layer w0.7: 120.886,73.914 pad.229 122.664,71.247 pad.230 ; VR2.1 123.934,93.345 128.379,97.79 128.379,100.292 128.239,100.432 ; VR2.3 128.252,90.297 128.252,86.233
  Bottom Layer w0.75: pad.3@132.316,75.374 pad.4@132.316,77.374 ; pad.5@132.316,79.374 pad.6@132.316,81.374
  Bottom Layer w1: pad.226@94.259,93.81 109.837,93.81 pad.164 ; pad.87 95.105,73.787 99.931,68.961 125.204,68.961 125.575,69.332 125.575,69.723 ; pad.120 115.679,74.168 116.441,74.93 U9.2 ; pad.78 118.219,73.025 121.521,69.723 149.588,69.723 150.553,68.758 MPMP5.162 ; pad.212@160.891,105.41 161.145,105.156 pad.1@163.177,105.156 ; pad.220@165.844,97.028 167.177,98.361 167.177,105.156 167.177,98.742 168.892,97.028 pad.220@168.892,94.996 ; pad.212@174.226,105.791 174.48,105.537 pad.1@176.512,105.537 ; pad.212@174.48,84.582 174.734,84.328 pad.1@176.766,84.328 ; pad.220@179.179,97.409 180.512,98.742 180.512,105.537 180.512,99.123 182.227,97.409 pad.220@182.227,95.377 ; pad.220@179.433,76.2 180.766,77.534 180.766,84.328 180.766,77.915 182.481,76.2 pad.220@182.481,74.168 ; pad.212@188.577,84.582 188.831,84.328 pad.1@190.863,84.328 ; pad.212@189.339,105.918 189.593,105.664 pad.1@191.625,105.664 ; pad.220@193.53,76.2 194.863,77.534 194.863,84.328 194.863,77.915 196.578,76.2 pad.220@196.578,74.168 ; pad.220@194.292,97.536 195.625,98.87 195.625,105.664 195.625,99.251 197.34,97.536 pad.220@197.34,95.504 ; pad.212@202.674,84.201 202.928,83.947 pad.1@204.96,83.947 ; pad.212@203.055,105.664 203.309,105.41 pad.1@205.341,105.41 ; pad.220@207.627,75.819 208.96,77.153 208.96,83.947 208.96,77.534 210.675,75.819 pad.220@210.675,73.787 ; pad.220@208.008,97.282 209.341,98.615 209.341,105.41 209.341,98.996 211.056,97.282 pad.220@211.056,95.25
  Bottom Layer w1.5: 117.711,64.008 REF15.1
  Bottom Layer w2: pad.218 124.06,56.007 U7.5 ; pad.218@122.537,54.483 121.394,54.483 121.394,57.531 123.058,59.195 REF15.2 ; REF15.2@123.553,59.309 143.111,59.309 148.013,64.211 MPMP5.163 ; U7.1 114.028,45.847 112.504,47.371 112.504,56.388 117.571,61.455 120.899,61.455 127.223,67.78 MPMP5.165
S$41414: U3.1 U10.1 | length 1.8
  Top Layer w0.65: U3.1@139.217,60.101 U10.1
S$41515: pad.251 VR1.3 | length 32.4
  Bottom Layer w0.5: pad.251 136.253,101.981 136.253,99.568 145.397,90.424 145.397,82.677 142.73,80.01 141.714,80.01 141.206,79.502 VR1.3
pads on no net: REF4.2 REF16. U1.4 U1.6 U1.17 U1.18 U1.19 U1.20 U1.22 U1.29 U1.30 U1.31 U2.1 U2.2 U2.3 U2.4 U2.5 U3.2 U3.3 U4.BAT+ U4.BAT- U4.IN+ U4.IN- U5.2 U6.2 U7.0 U7.2 U7.6 U7.7 U7.8 U7.9 U7.10 U7.11 U10.2 U14.1 U18.25 U18.A2 U18.A3 U18.A5 U18.A6 U18.A7 U18.A8 U18.A10 U18.A11 U20.2 U36.1 U60.1
copper on no net: | length 371
  Top Layer w0.254: 159.621,91.053 170.621,91.053 170.621,106.553 159.621,106.553 159.621,91.053 ; 172.956,91.434 183.956,91.434 183.956,106.934 172.956,106.934 172.956,91.434 ; 173.21,70.225 184.21,70.225 184.21,85.725 173.21,85.725 173.21,70.225 ; 187.307,70.225 198.307,70.225 198.307,85.725 187.307,85.725 187.307,70.225 ; 188.069,91.561 199.069,91.561 199.069,107.061 188.069,107.061 188.069,91.561 ; 201.404,69.844 212.404,69.844 212.404,85.344 201.404,85.344 201.404,69.844 ; 201.785,91.307 212.785,91.307 212.785,106.807 201.785,106.807 201.785,91.307

## Other copper
Top Layer:
  pour cut-out: 174.677,68.834 187.123,68.834 194.997,59.055 192.457,46.736 181.154,41.275 169.978,46.863 167.438,59.563
  text "." at 90.404,97.919 h0.01 r230
  text "." at 89.769,97.538 h0.01 r230
  text "." at 89.261,96.776 h0.01 r230
  text "." at 84.157,93.218 h0.05 r270

## Silkscreen, mask and mechanical layers (free items; w line width, h text height)
Top Overlay:
  lines w0.127: 104.439,101.981 104.597,85.237 ; 104.541,102.006 129.865,102.057 129.839,85.141 ; 104.582,85.138 129.824,85.042
  lines w0.254: 160.064,94.552 161.464,94.552 161.464,102.552 160.064,102.552 160.064,94.552 ; 173.399,94.933 174.799,94.933 174.799,102.933 173.399,102.933 173.399,94.933 ; 173.653,73.724 175.053,73.724 175.053,81.724 173.653,81.724 173.653,73.724 ; 187.75,73.724 189.15,73.724 189.15,81.724 187.75,81.724 187.75,73.724 ; 188.512,95.06 189.912,95.06 189.912,103.06 188.512,103.06 188.512,95.06 ; 201.847,73.343 203.247,73.343 203.247,81.343 201.847,81.343 201.847,73.343 ; 202.228,94.806 203.628,94.806 203.628,102.806 202.228,102.806 202.228,94.806
Document:
  text "VDD" at 108.313,111.31 h0.9
  text "TX" at 110.98,111.31 h0.9
  text "RX" at 113.393,111.31 h0.9
  text "RT" at 115.933,111.31 h0.9
  text "MOS" at 118.092,111.31 h0.9
  text "MIS" at 121.013,111.31 h0.9
  text "GND" at 123.426,111.31 h0.9
  text "SCK" at 126.22,111.31 h0.9
  text "REMTR" at 100.185,109.532 h0.9
  text "GND" at 132.395,108.707 h1.2 r50
  text "GND" at 198.956,103.124 h1.2 r90
  text "GND" at 183.843,102.997 h1.2 r90
  text "GND" at 212.672,102.87 h1.2 r90
  text "F1" at 138.721,102.671 h2 r315
  text "GND" at 170.508,102.616 h1.2 r90
  text "LED" at 196.035,101.6 h1.2 r90
  text "LED" at 180.922,101.473 h1.2 r90
  text "LED" at 209.751,101.346 h1.2 r90
  text "LED" at 167.587,101.092 h1.2 r90
  text "RBASE" at 100.058,100.642 h0.9
  text "MOS" at 133.205,99.58 h1.5
  text "RR" at 190.447,98.171 h1.2 r90
  text "RR" at 175.334,98.044 h1.2 r90
  text "RR" at 204.163,97.917 h1.2 r90
  text "RR" at 161.999,97.663 h1.2 r90
  text "R2" at 193.911,95.889 h0.5
  text "R2" at 178.798,95.762 h0.5
  text "R2" at 207.627,95.635 h0.5
  text "R2" at 165.463,95.381 h0.5
  text "DS" at 143.597,95.228 h1.5 r315
  text "R1" at 197.086,93.984 h0.5
  text "R1" at 181.973,93.857 h0.5
  text "R1" at 210.802,93.73 h0.5
  text "R1" at 168.638,93.476 h0.5
  text "VBAT" at 123.287,86.868 h1.5 r90
  text "OCILTR" at 101.836,82.354 h0.9
  text "GND" at 184.097,81.788 h1.2 r90
  text "GND" at 198.194,81.788 h1.2 r90
  text "GND" at 212.291,81.407 h1.2 r90
  text "LED" at 181.176,80.264 h1.2 r90
  text "LED" at 195.273,80.264 h1.2 r90
  text "LED" at 209.37,79.883 h1.2 r90
  text "RRS" at 131.115,78.74 h0.9 r90
  text "CM" at 116.187,78.671 h0.9
  text "C22" at 96.375,77.101 h1.5
  text "RR" at 175.588,76.835 h1.2 r90
  text "RR" at 189.685,76.835 h1.2 r90
  text "RR" at 203.782,76.454 h1.2 r90
  text "MADJ" at 148.052,75.438 h1.5 r90
  text "VCC" at 154.252,75.311 h1.2 r90
  text "R2" at 179.052,74.553 h0.5
  text "R2" at 193.149,74.553 h0.5
  text "R2" at 207.246,74.172 h0.5
  text "R1" at 182.227,72.648 h0.5
  text "R1" at 196.324,72.648 h0.5
  text "R1" at 210.421,72.267 h0.5
  text "GND" at 154.379,70.739 h1.2 r90
  text "RR" at 185.718,65.913 h1 r90
  text "GND" at 185.845,65.852 h1 r309
  text "GND" at 175.82,65.667 h1
  text "RR" at 175.493,65.037 h1 r142
  text "LED'S" at 84.624,60.351 h1.5 r310
  text "RSWTCH" at 146.858,60.007 h0.9 r45
  text "GND" at 192.224,58.532 h1 r257
  text "RR" at 191.882,57.904 h1 r39
  text "RR" at 170.771,57.768 h1 r191
  text "GND" at 169.35,57.216 h1 r51
  text "CS800" at 123.807,56.065 h0.9
  text "RLED" at 133.528,50.419 h0.9 r90
  text "RR" at 189.779,48.922 h1 r344
  text "GND" at 190.706,48.579 h1 r207
  text "GND" at 173.009,48.228 h1 r101
  text "RR" at 172.954,48.217 h1 r245
  text "GND" at 182.424,47.76 h1
  text "LED" at 136.318,44.471 h1.4 r125
  text "RR" at 181.974,44.104 h1 r296
  text "GND" at 182.008,44.01 h1 r154

## Text inside footprints (layer, text, board x,y; h text height)
MPMP5: Document "IN+" at 138.659,82.766 h1.5 r90; Document "OUT+" at 138.659,69.05 h1.5 r90; Document "IN-" at 150.089,82.512 h1.5 r90; Document "OUT-" at 150.089,69.05 h1.5 r90
SW2: Top Overlay "ON" at 181.973,54.229 h0.76 r180; Top Overlay "ON" at 181.973,56.769 h0.76 r180
U4: Top Overlay "TP5100" at 129.004,95.117 h3 r180; Top Overlay "IN 5..15v" at 118.302,90.9 h2 r180; Top Overlay "IN+" at 111.103,87.178 h1.5 r180; Top Overlay "BAT+" at 126.403,87.176 h1.5 r180; Top Overlay "BAT-" at 126.404,101.478 h1.5 r180; Top Overlay "IN-" at 111.102,101.478 h1.5 r180
U7: Document "GND" at 124.188,54.872 h1; Document "RING" at 110.853,45.347 h1; Document "DTR" at 110.853,47.887 h1; Document "MIC+" at 110.853,50.427 h1; Document "MIC-" at 110.853,52.967 h1; Document "SPK+" at 110.853,55.507 h1; Document "SPK-" at 110.853,58.047 h1; Document "TXD" at 124.188,52.332 h1; Document "NET" at 124.188,42.172 h1; Document "RXD" at 124.188,49.792 h1; Document "VCC" at 124.188,44.712 h1; Document "RST" at 124.188,47.252 h1
U17: Document "+" at 101.65,53.399 h1.27 r45